# EAGLE board SMD Practice Board manufactured 2016-10-13 (EAGLE 7.6.0)
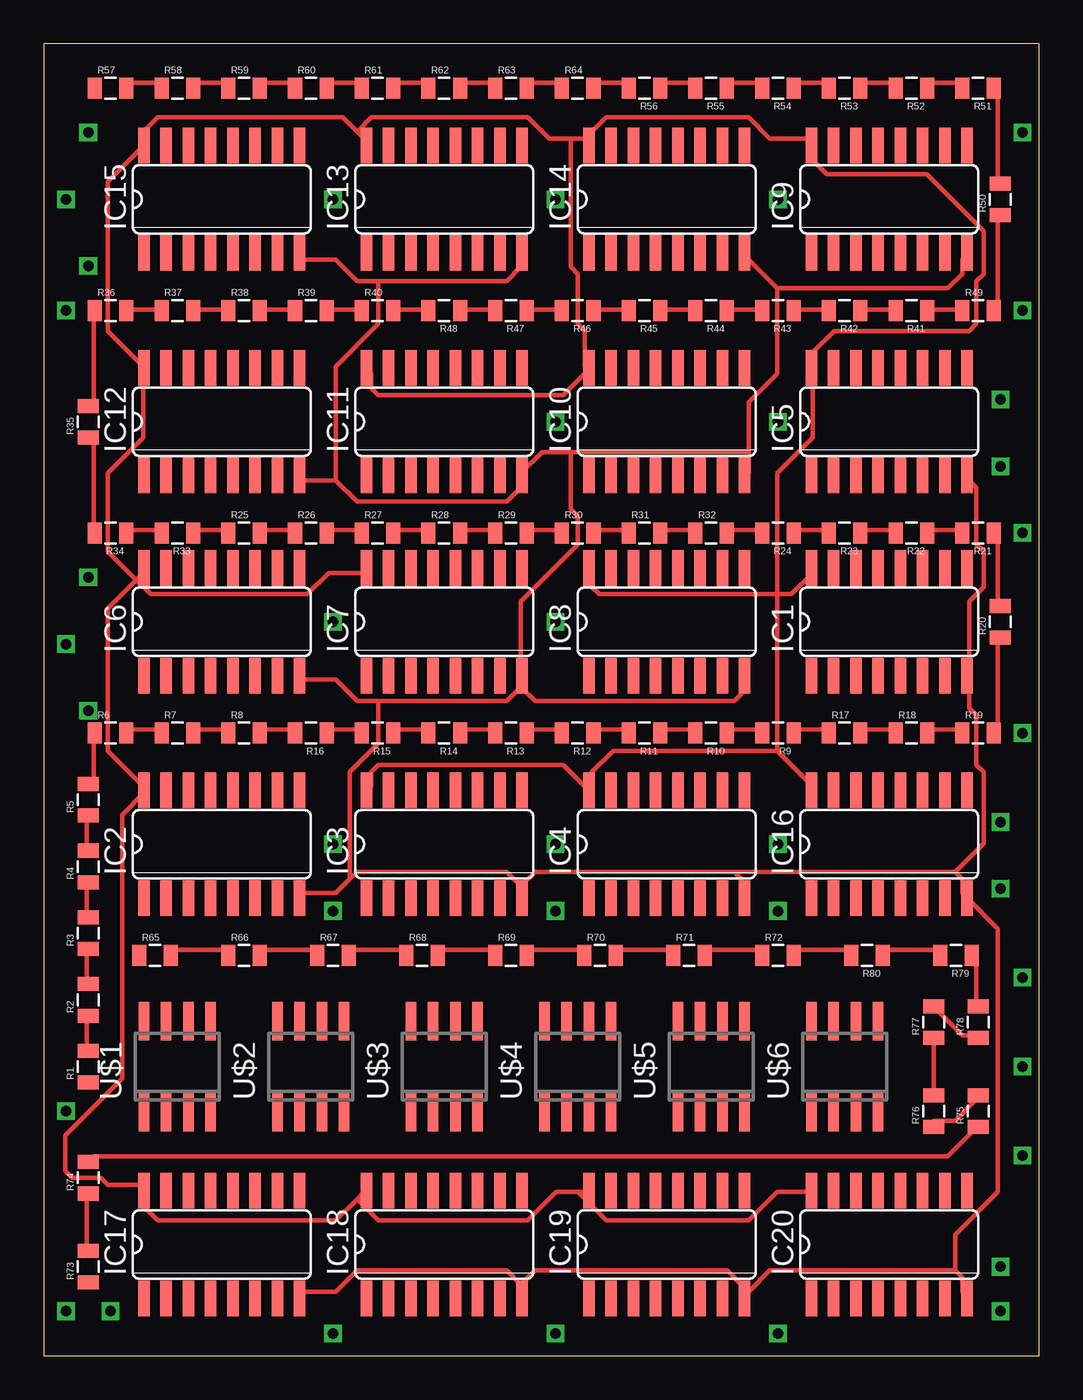
[diagram p0: board, top side]

Size 56.82 x 74.92 mm. Coordinates in mm from the lower left corner, seen from the top.
Outline: 0,0 56.82,0 56.82,74.92 0,74.92 0,0
Copper layers (1*16): Top 0.035mm / dielectric 1.5mm / Bottom 0.035mm
Design rules "default": minimum track width 10mil, minimum drill 24mil, track to track 8mil, track to pad 8mil, pad to pad 8mil, via to via 8mil, smd to smd 8mil, copper to edge 40mil, drill to drill 8mil, minimum pad ring 10mil, minimum via ring 8mil, stop-mask expansion 4mil, vias tented up to drill 0mil, thermal gap 10mil

## Footprints (pad centres in the part's own frame; a part is rotated, then mirrored left to right if it is on the bottom)
SO16 = smd 0.66 x 2.032: 1 -4.445,-3.073; 2 -3.175,-3.073; 3 -1.905,-3.073; 4 -0.635,-3.073; 5 0.635,-3.073; 6 1.905,-3.073; 7 3.175,-3.073; 8 4.445,-3.073; 9 4.445,3.073; 10 3.175,3.073; 11 1.905,3.073; 12 0.635,3.073; 13 -0.635,3.073; 14 -1.905,3.073; 15 -3.175,3.073; 16 -4.445,3.073
0805 = smd 0.8 x 1.2: 1 -0.9,0; 2 0.9,0
SOIC-08 = smd 0.6 x 2.2: 1 -1.905,-2.6; 2 -0.635,-2.6; 3 0.635,-2.6; 4 1.905,-2.6; 5 1.905,2.6; 6 0.635,2.6; 7 -0.635,2.6; 8 -1.905,2.6

## Placement (x,y rotation side)
IC1  74LS258D  [SO16]  48.26,41.91 0 top
IC2  74LS258D  [SO16]  10.16,29.21 0 top
IC3  74LS258D  [SO16]  22.86,29.21 0 top
IC4  74LS258D  [SO16]  35.56,29.21 0 top
IC5  74LS258D  [SO16]  48.26,53.34 0 top
IC6  74LS258D  [SO16]  10.16,41.91 0 top
IC7  74LS258D  [SO16]  22.86,41.91 0 top
IC8  74LS258D  [SO16]  35.56,41.91 0 top
IC9  74LS258D  [SO16]  48.26,66.04 0 top
IC10  74LS258D  [SO16]  35.56,53.34 0 top
IC11  74LS258D  [SO16]  22.86,53.34 0 top
IC12  74LS258D  [SO16]  10.16,53.34 0 top
IC13  74LS258D  [SO16]  22.86,66.04 0 top
IC14  74LS258D  [SO16]  35.56,66.04 0 top
IC15  74LS258D  [SO16]  10.16,66.04 0 top
IC16  74LS258D  [SO16]  48.26,29.21 0 top
IC17  74LS258D  [SO16]  10.16,6.35 0 top
IC18  74LS258D  [SO16]  22.86,6.35 0 top
IC19  74LS258D  [SO16]  35.56,6.35 0 top
IC20  74LS258D  [SO16]  48.26,6.35 0 top
R1  [0805]  2.54,16.51 90 top
R2  [0805]  2.54,20.32 90 top
R3  [0805]  2.54,24.13 90 top
R4  [0805]  2.54,27.94 90 top
R5  [0805]  2.54,31.75 90 top
R6  [0805]  3.81,35.56 0 top
R7  [0805]  7.62,35.56 0 top
R8  [0805]  11.43,35.56 0 top
R9  [0805]  41.91,35.56 180 top
R10  [0805]  38.1,35.56 180 top
R11  [0805]  34.29,35.56 180 top
R12  [0805]  30.48,35.56 180 top
R13  [0805]  26.67,35.56 180 top
R14  [0805]  22.86,35.56 180 top
R15  [0805]  19.05,35.56 180 top
R16  [0805]  15.24,35.56 180 top
R17  [0805]  45.72,35.56 0 top
R18  [0805]  49.53,35.56 0 top
R19  [0805]  53.34,35.56 0 top
R20  [0805]  54.61,41.91 90 top
R21  [0805]  53.34,46.99 180 top
R22  [0805]  49.53,46.99 180 top
R23  [0805]  45.72,46.99 180 top
R24  [0805]  41.91,46.99 180 top
R25  [0805]  11.43,46.99 0 top
R26  [0805]  15.24,46.99 0 top
R27  [0805]  19.05,46.99 0 top
R28  [0805]  22.86,46.99 0 top
R29  [0805]  26.67,46.99 0 top
R30  [0805]  30.48,46.99 0 top
R31  [0805]  34.29,46.99 0 top
R32  [0805]  38.1,46.99 0 top
R33  [0805]  7.62,46.99 180 top
R34  [0805]  3.81,46.99 180 top
R35  [0805]  2.54,53.34 90 top
R36  [0805]  3.81,59.69 0 top
R37  [0805]  7.62,59.69 0 top
R38  [0805]  11.43,59.69 0 top
R39  [0805]  15.24,59.69 0 top
R40  [0805]  19.05,59.69 0 top
R41  [0805]  49.53,59.69 180 top
R42  [0805]  45.72,59.69 180 top
R43  [0805]  41.91,59.69 180 top
R44  [0805]  38.1,59.69 180 top
R45  [0805]  34.29,59.69 180 top
R46  [0805]  30.48,59.69 180 top
R47  [0805]  26.67,59.69 180 top
R48  [0805]  22.86,59.69 180 top
R49  [0805]  53.34,59.69 0 top
R50  [0805]  54.61,66.04 90 top
R51  [0805]  53.34,72.39 180 top
R52  [0805]  49.53,72.39 180 top
R53  [0805]  45.72,72.39 180 top
R54  [0805]  41.91,72.39 180 top
R55  [0805]  38.1,72.39 180 top
R56  [0805]  34.29,72.39 180 top
R57  [0805]  3.81,72.39 0 top
R58  [0805]  7.62,72.39 0 top
R59  [0805]  11.43,72.39 0 top
R60  [0805]  15.24,72.39 0 top
R61  [0805]  19.05,72.39 0 top
R62  [0805]  22.86,72.39 0 top
R63  [0805]  26.67,72.39 0 top
R64  [0805]  30.48,72.39 0 top
R65  [0805]  6.35,22.86 0 top
R66  [0805]  11.43,22.86 0 top
R67  [0805]  16.51,22.86 0 top
R68  [0805]  21.59,22.86 0 top
R69  [0805]  26.67,22.86 0 top
R70  [0805]  31.75,22.86 0 top
R71  [0805]  36.83,22.86 0 top
R72  [0805]  41.91,22.86 0 top
R73  [0805]  2.54,5.08 90 top
R74  [0805]  2.54,10.16 90 top
R75  [0805]  53.34,13.97 90 top
R76  [0805]  50.8,13.97 90 top
R77  [0805]  50.8,19.05 90 top
R78  [0805]  53.34,19.05 90 top
R79  [0805]  52.07,22.86 180 top
R80  [0805]  46.99,22.86 180 top
U$1  MCP2551  [SOIC-08]  7.62,16.51 0 top
U$2  MCP2551  [SOIC-08]  15.24,16.51 0 top
U$3  MCP2551  [SOIC-08]  22.86,16.51 0 top
U$4  MCP2551  [SOIC-08]  30.48,16.51 0 top
U$5  MCP2551  [SOIC-08]  38.1,16.51 0 top
U$6  MCP2551  [SOIC-08]  45.72,16.51 0 top

## Library data of the parts
IC1-IC20 = 74xx-us
R1-R80 U$1-U$6 = HyTechDevices

## Nets
GND: IC1.8 IC2.8 IC3.8 IC4.8 IC5.8 IC6.8 IC7.8 IC8.8 IC9.8 IC10.8 IC11.8 IC12.8 IC13.8 IC14.8 IC15.8 IC16.8 IC17.8 IC18.8 IC19.8 IC20.8
N$1: R1.2 R2.1
N$2: R2.2 R3.1
N$3: R3.2 R4.1
N$4: R5.2 R6.1
N$5: R6.2 R7.1
N$6: R7.2 R8.1
N$7: R4.2 R5.1
N$8: R9.2 R10.1
N$9: R10.2 R11.1
N$10: R11.2 R12.1
N$11: R13.2 R14.1
N$12: R14.2 R15.1
N$13: R15.2 R16.1
N$14: R12.2 R13.1
N$15: R8.2 R16.2
N$16: R17.2 R18.1
N$17: R18.2 R19.1
N$18: R19.2 R20.1
N$19: R21.2 R22.1
N$20: R22.2 R23.1
N$21: R23.2 R24.1
N$22: R20.2 R21.1
N$23: R25.2 R26.1
N$24: R26.2 R27.1
N$25: R27.2 R28.1
N$26: R29.2 R30.1
N$27: R30.2 R31.1
N$28: R31.2 R32.1
N$29: R28.2 R29.1
N$30: R24.2 R32.2
N$31: R9.1 R17.1
N$32: R33.2 R34.1
N$33: R34.2 R35.1
N$34: R35.2 R36.1
N$35: R37.2 R38.1
N$36: R38.2 R39.1
N$37: R39.2 R40.1
N$38: R36.2 R37.1
N$39: R41.2 R42.1
N$40: R42.2 R43.1
N$41: R43.2 R44.1
N$42: R45.2 R46.1
N$43: R46.2 R47.1
N$44: R47.2 R48.1
N$45: R44.2 R45.1
N$46: R40.2 R48.2
N$47: R49.2 R50.1
N$48: R50.2 R51.1
N$49: R51.2 R52.1
N$50: R53.2 R54.1
N$51: R54.2 R55.1
N$52: R55.2 R56.1
N$53: R52.2 R53.1
N$54: R57.2 R58.1
N$55: R58.2 R59.1
N$56: R59.2 R60.1
N$57: R61.2 R62.1
N$58: R62.2 R63.1
N$59: R63.2 R64.1
N$60: R60.2 R61.1
N$61: R56.2 R64.2
N$62: R41.1 R49.1
N$63: R25.1 R33.1
N$64: R65.2 R66.1
N$65: R66.2 R67.1
N$66: R67.2 R68.1
N$67: R69.2 R70.1
N$68: R70.2 R71.1
N$69: R71.2 R72.1
N$70: R68.2 R69.1
N$71: R73.2 R74.1
N$72: R74.2 R75.1
N$73: R75.2 R76.1
N$74: R77.2 R78.1
N$75: R78.2 R79.1
N$76: R79.2 R80.1
N$77: R76.2 R77.1
N$78: R72.2 R80.2
VCC: IC1.16 IC2.16 IC3.16 IC4.16 IC5.16 IC6.16 IC7.16 IC8.16 IC9.16 IC10.16 IC11.16 IC12.16 IC13.16 IC14.16 IC15.16 IC16.16 IC17.16 IC18.16 IC19.16 IC20.16

## Tracks (layer width: path | path; a pad name or v marks a point on that pad's centre or on a via)
GND
  Top 0.254: 40.23,51.61 40.23,54.46 41.86,56.08 41.86,60.96 | 40.23,51.61 40.23,50.39 IC10.8 | 41.86,60.96 40.23,62.59 IC14.8 | 41.86,60.96 51.61,60.96 52.43,61.77 52.43,62.59 IC9.8 | 16.66,49.99 14.63,49.99 IC12.8 | 16.66,49.99 17.88,48.77 26.42,48.77 27.23,49.58 27.23,49.99 IC11.8 27.23,50.39 28.45,51.61 30.07,51.61 | 19.1,61.37 26.42,61.37 27.23,62.18 27.23,62.59 IC13.8 | 19.1,61.37 17.88,61.37 16.66,62.59 14.63,62.59 IC15.8 | 16.66,49.99 16.66,56.49 19.1,58.93 19.1,61.37 | 30.07,51.61 40.23,51.61 | 27.23,4.06 26.42,4.88 17.88,4.88 16.66,3.66 14.63,3.66 IC17.8 | 27.23,4.06 27.23,3.66 IC18.8 27.23,4.06 | 27.23,4.06 28.04,4.88 39.01,4.88 39.83,4.06 39.83,3.66 IC19.8 40.23,3.66 41.45,4.88 52.02,4.88 | 52.02,4.88 52.43,4.47 52.43,3.66 IC20.8 | 19.1,37.39 26.42,37.39 27.23,38.2 | 19.1,37.39 17.88,37.39 16.66,38.61 14.63,38.61 IC6.8 | 27.23,38.2 27.23,38.61 IC7.8 | 27.23,38.2 28.04,37.39 39.42,37.39 39.83,37.8 39.83,38.61 IC8.8 | 27.23,38.2 IC7.8 | IC5.8 52.83,49.99 53.24,49.58 53.24,46.33 53.65,45.92 53.65,43.89 52.83,43.08 52.83,39.01 IC1.8 52.83,38.61 52.83,36.98 53.24,36.58 53.24,33.73 53.65,33.33 53.65,29.26 52.02,27.64 | 17.48,27.23 17.88,27.64 26.42,27.64 27.23,26.82 | 17.48,27.23 16.66,26.42 14.63,26.42 IC2.8 | 27.23,26.82 27.23,26.42 IC3.8 27.23,26.82 | 39.42,27.64 39.83,27.23 39.83,26.42 IC4.8 | 39.42,27.64 28.04,27.64 27.23,26.82 | 52.02,27.64 52.43,27.23 52.43,26.42 IC16.8 54.46,24.38 54.46,9.35 52.02,6.91 52.02,4.88 | 39.42,27.64 52.02,27.64 | 19.1,37.39 19.1,34.95 17.48,33.33 17.48,27.23 | 30.07,51.61 30.07,48.36 30.48,47.95 30.48,46.33 27.23,43.08 27.23,39.01 IC7.8
N$1
  Top 0.254: R1.2 2.44,17.48 2.44,19.1 R2.1
N$2
  Top 0.254: R2.2 2.44,21.54 2.44,23.16 R3.1
N$3
  Top 0.254: R3.2 2.44,25.2 2.44,26.82 R4.1
N$4
  Top 0.254: R5.2 2.85,32.92 2.85,35.36 R6.1
N$5
  Top 0.254: R6.2 4.88,35.76 6.5,35.76 R7.1
N$6
  Top 0.254: R7.2 8.53,35.76 10.16,35.76 R8.1
N$7
  Top 0.254: R4.2 2.44,28.85 2.44,30.48 R5.1
N$8
  Top 0.254: R10.1 39.01,35.76 40.64,35.76 R9.2
N$9
  Top 0.254: R11.1 35.36,35.76 36.98,35.76 R10.2
N$10
  Top 0.254: R12.1 31.7,35.76 33.33,35.76 R11.2
N$11
  Top 0.254: R14.1 23.98,35.76 25.6,35.76 R13.2
N$12
  Top 0.254: R15.1 20.32,35.76 21.95,35.76 R14.2
N$13
  Top 0.254: R16.1 16.26,35.76 17.88,35.76 R15.2
N$14
  Top 0.254: R13.1 27.64,35.76 29.26,35.76 R12.2
N$15
  Top 0.254: R8.2 12.6,35.76 14.22,35.76 R16.2
N$16
  Top 0.254: R17.2 46.74,35.76 48.36,35.76 R18.1
N$17
  Top 0.254: R18.2 50.8,35.76 52.43,35.76 R19.1
N$18
  Top 0.254: R19.2 54.46,35.76 54.46,40.64 R20.1
N$19
  Top 0.254: R22.1 50.8,47.14 52.43,47.14 R21.2
N$20
  Top 0.254: R23.1 46.74,47.14 48.36,47.14 R22.2
N$21
  Top 0.254: R24.1 43.08,47.14 44.7,47.14 R23.2
N$22
  Top 0.254: R21.1 54.46,46.74 54.46,43.08 R20.2
N$23
  Top 0.254: R25.2 12.6,47.14 14.22,47.14 R26.1
N$24
  Top 0.254: R26.2 16.26,47.14 17.88,47.14 R27.1
N$25
  Top 0.254: R27.2 20.32,47.14 21.95,47.14 R28.1
N$26
  Top 0.254: R29.2 27.64,47.14 29.26,47.14 R30.1
N$27
  Top 0.254: R30.2 31.7,47.14 33.33,47.14 R31.1
N$28
  Top 0.254: R31.2 35.36,47.14 36.98,47.14 R32.1
N$29
  Top 0.254: R28.2 23.98,47.14 25.6,47.14 R29.1
N$30
  Top 0.254: R32.2 39.01,47.14 40.64,47.14 R24.2
N$31
  Top 0.254: R9.1 43.08,35.76 44.7,35.76 R17.1
N$32
  Top 0.254: R34.1 4.88,47.14 6.5,47.14 R33.2
N$33
  Top 0.254: R35.1 2.85,52.43 2.85,47.14 R34.2
N$34
  Top 0.254: R35.2 2.85,54.46 2.85,59.33 R36.1
N$35
  Top 0.254: R37.2 8.53,59.74 10.16,59.74 R38.1
N$36
  Top 0.254: R38.2 12.6,59.74 14.22,59.74 R39.1
N$37
  Top 0.254: R39.2 16.26,59.74 17.88,59.74 R40.1
N$38
  Top 0.254: R36.2 4.88,59.74 6.5,59.74 R37.1
N$39
  Top 0.254: R42.1 46.74,59.74 48.36,59.74 R41.2
N$40
  Top 0.254: R43.1 43.08,59.74 44.7,59.74 R42.2
N$41
  Top 0.254: R44.1 39.01,59.74 40.64,59.74 R43.2
N$42
  Top 0.254: R46.1 31.7,59.74 33.33,59.74 R45.2
N$43
  Top 0.254: R47.1 27.64,59.74 29.26,59.74 R46.2
N$44
  Top 0.254: R48.1 23.98,59.74 25.6,59.74 R47.2
N$45
  Top 0.254: R45.1 35.36,59.74 36.98,59.74 R44.2
N$46
  Top 0.254: R40.2 20.32,59.74 21.95,59.74 R48.2
N$47
  Top 0.254: R49.2 54.46,59.74 54.46,65.02 R50.1
N$48
  Top 0.254: R51.1 54.46,72.29 54.46,67.06 R50.2
N$49
  Top 0.254: R52.1 50.8,72.69 52.43,72.69 R51.2
N$50
  Top 0.254: R54.1 43.08,72.69 44.7,72.69 R53.2
N$51
  Top 0.254: R55.1 39.01,72.69 40.64,72.69 R54.2
N$52
  Top 0.254: R56.1 35.36,72.69 36.98,72.69 R55.2
N$53
  Top 0.254: R53.1 46.74,72.69 48.36,72.69 R52.2
N$54
  Top 0.254: R57.2 4.88,72.69 6.5,72.69 R58.1
N$55
  Top 0.254: R58.2 8.53,72.69 10.16,72.69 R59.1
N$56
  Top 0.254: R59.2 12.6,72.69 14.22,72.69 R60.1
N$57
  Top 0.254: R61.2 20.32,72.69 21.95,72.69 R62.1
N$58
  Top 0.254: R62.2 23.98,72.69 25.6,72.69 R63.1
N$59
  Top 0.254: R63.2 27.64,72.69 29.26,72.69 R64.1
N$60
  Top 0.254: R60.2 16.26,72.69 17.88,72.69 R61.1
N$61
  Top 0.254: R64.2 31.7,72.69 33.33,72.69 R56.2
N$62
  Top 0.254: R41.1 50.8,59.74 52.43,59.74 R49.1
N$63
  Top 0.254: R33.1 8.53,47.14 10.16,47.14 R25.1
N$64
  Top 0.254: R65.2 7.32,23.16 10.16,23.16 R66.1
N$65
  Top 0.254: R66.2 12.6,23.16 15.44,23.16 R67.1
N$66
  Top 0.254: R67.2 17.48,23.16 20.32,23.16 R68.1
N$67
  Top 0.254: R69.2 27.64,23.16 30.48,23.16 R70.1
N$68
  Top 0.254: R70.2 32.92,23.16 35.76,23.16 R71.1
N$69
  Top 0.254: R71.2 37.8,23.16 40.64,23.16 R72.1
N$70
  Top 0.254: R68.2 22.76,23.16 25.6,23.16 R69.1
N$71
  Top 0.254: R73.2 2.44,6.1 2.44,8.94 R74.1
N$72
  Top 0.254: R74.2 2.85,11.38 51.61,11.38 53.24,13.01 R75.1
N$73
  Top 0.254: R76.1 50.8,13.41 52.02,13.41 53.24,14.63 R75.2
N$74
  Top 0.254: R78.1 53.24,18.29 52.43,18.29 50.8,19.91 R77.2
N$75
  Top 0.254: R79.1 53.24,22.76 53.24,20.32 R78.2
N$76
  Top 0.254: R80.1 47.95,23.16 50.8,23.16 R79.2
N$77
  Top 0.254: R77.1 R76.2
N$78
  Top 0.254: R72.2 43.08,23.16 45.92,23.16 R80.2
N$79  (via drill 0.6)
  other vias: 2.54,69.85
N$80  (via drill 0.6)
  other vias: 1.27,66.04
N$81  (via drill 0.6)
  other vias: 2.54,62.23
N$82  (via drill 0.6)
  other vias: 1.27,59.69
N$83  (via drill 0.6)
  other vias: 2.54,44.45
N$84  (via drill 0.6)
  other vias: 1.27,40.64
N$85  (via drill 0.6)
  other vias: 2.54,36.83
N$86  (via drill 0.6)
  other vias: 1.27,13.97
N$87  (via drill 0.6)
  other vias: 1.27,2.54
N$88  (via drill 0.6)
  other vias: 3.81,2.54
N$89  (via drill 0.6)
  other vias: 54.61,2.54
N$90  (via drill 0.6)
  other vias: 54.61,5.08
N$91  (via drill 0.6)
  other vias: 54.61,26.67
N$92  (via drill 0.6)
  other vias: 54.61,30.48
N$93  (via drill 0.6)
  other vias: 54.61,54.61
N$94  (via drill 0.6)
  other vias: 54.61,50.8
N$95  (via drill 0.6)
  other vias: 55.88,69.85
N$96  (via drill 0.6)
  other vias: 55.88,46.99
N$97  (via drill 0.6)
  other vias: 55.88,59.69
N$98  (via drill 0.6)
  other vias: 55.88,35.56
N$99  (via drill 0.6)
  other vias: 55.88,21.59
N$100  (via drill 0.6)
  other vias: 55.88,16.51
N$101  (via drill 0.6)
  other vias: 55.88,11.43
N$102  (via drill 0.6)
  other vias: 16.51,1.27
N$103  (via drill 0.6)
  other vias: 29.21,1.27
N$104  (via drill 0.6)
  other vias: 41.91,1.27
N$105  (via drill 0.6)
  other vias: 41.91,25.4
N$106  (via drill 0.6)
  other vias: 29.21,25.4
N$107  (via drill 0.6)
  other vias: 16.51,25.4
N$108  (via drill 0.6)
  other vias: 16.51,41.91
N$109  (via drill 0.6)
  other vias: 16.51,29.21
N$110  (via drill 0.6)
  other vias: 29.21,29.21
N$111  (via drill 0.6)
  other vias: 41.91,29.21
N$112  (via drill 0.6)
  other vias: 29.21,41.91
N$113  (via drill 0.6)
  other vias: 29.21,53.34
N$114  (via drill 0.6)
  other vias: 41.91,53.34
N$115  (via drill 0.6)
  other vias: 41.91,66.04
N$116  (via drill 0.6)
  other vias: 29.21,66.04
N$117  (via drill 0.6)
  other vias: 16.51,66.04
VCC
  Top 0.254: IC3.16 18.69,32.51 18.69,33.33 19.1,33.73 29.67,33.73 IC4.16 31.29,32.51 31.29,33.33 32.51,34.54 41.86,34.54 | 41.86,43.48 42.67,43.48 43.89,44.7 IC1.16 | 41.86,43.48 31.7,43.48 31.29,43.89 31.29,44.7 IC8.16 | 41.86,34.54 43.89,32.51 IC16.16 | 41.86,43.48 41.86,34.54 | 41.86,43.48 41.86,50.39 43.89,52.43 43.89,56.08 IC5.16 43.89,56.49 43.89,57.3 45.11,58.52 52.83,58.52 53.24,58.93 53.24,61.37 53.65,61.77 53.65,64.21 50.39,67.46 44.7,67.46 43.89,68.28 43.89,69.09 IC9.16 43.89,69.49 41.45,69.49 40.23,70.71 32.11,70.71 30.89,69.49 | 17.88,8.94 18.29,9.35 IC18.16 | 17.88,8.94 16.66,7.72 6.5,7.72 5.69,8.53 5.69,9.35 IC17.16 5.69,9.75 3.66,9.75 3.25,10.16 1.63,10.16 1.22,10.57 1.22,12.6 4.47,15.85 4.47,30.89 5.69,32.11 IC2.16 5.69,32.51 3.66,34.54 3.66,42.67 5.28,44.3 | 30.48,9.35 29.26,9.35 27.64,7.72 19.1,7.72 17.88,8.94 | 30.48,9.35 30.89,9.35 IC19.16 | 30.48,9.35 32.11,7.72 40.23,7.72 41.86,9.35 43.89,9.35 IC20.16 | 5.28,44.3 5.69,44.7 IC6.16 | 5.28,44.3 3.66,45.92 3.66,50.39 5.69,52.43 5.69,56.08 IC12.16 5.69,56.49 3.66,58.52 3.66,67.06 IC15.16 5.69,69.49 5.69,69.9 6.5,70.71 17.07,70.71 17.88,69.9 | 5.28,44.3 6.1,43.48 15.04,43.48 16.26,44.7 18.29,44.7 IC7.16 | IC11.16 18.69,56.08 18.69,55.27 19.1,54.86 29.67,54.86 30.89,56.08 IC10.16 30.89,56.49 30.89,58.52 30.48,58.93 30.48,61.77 30.07,62.18 30.07,69.49 | 17.88,69.9 18.29,69.49 IC13.16 | 30.07,69.49 28.85,69.49 27.64,70.71 18.69,70.71 17.88,69.9 | 30.07,69.49 30.89,69.49 | 30.89,69.49 IC14.16